# Altium PCB wather_project_PCB.PcbDoc
Units mm, origin at the board's own origin, x right, y up, seen from the top; angles counter-clockwise.
Board outline 30.48 x 40 mm, 4 copper layers (Top Layer, GND 1, GND 2, Bottom Layer), stack 1.569 mm thick; 28 components, 23 nets, 149 pads, 70 vias.
Unrouted connection lines stored in the file: 1.
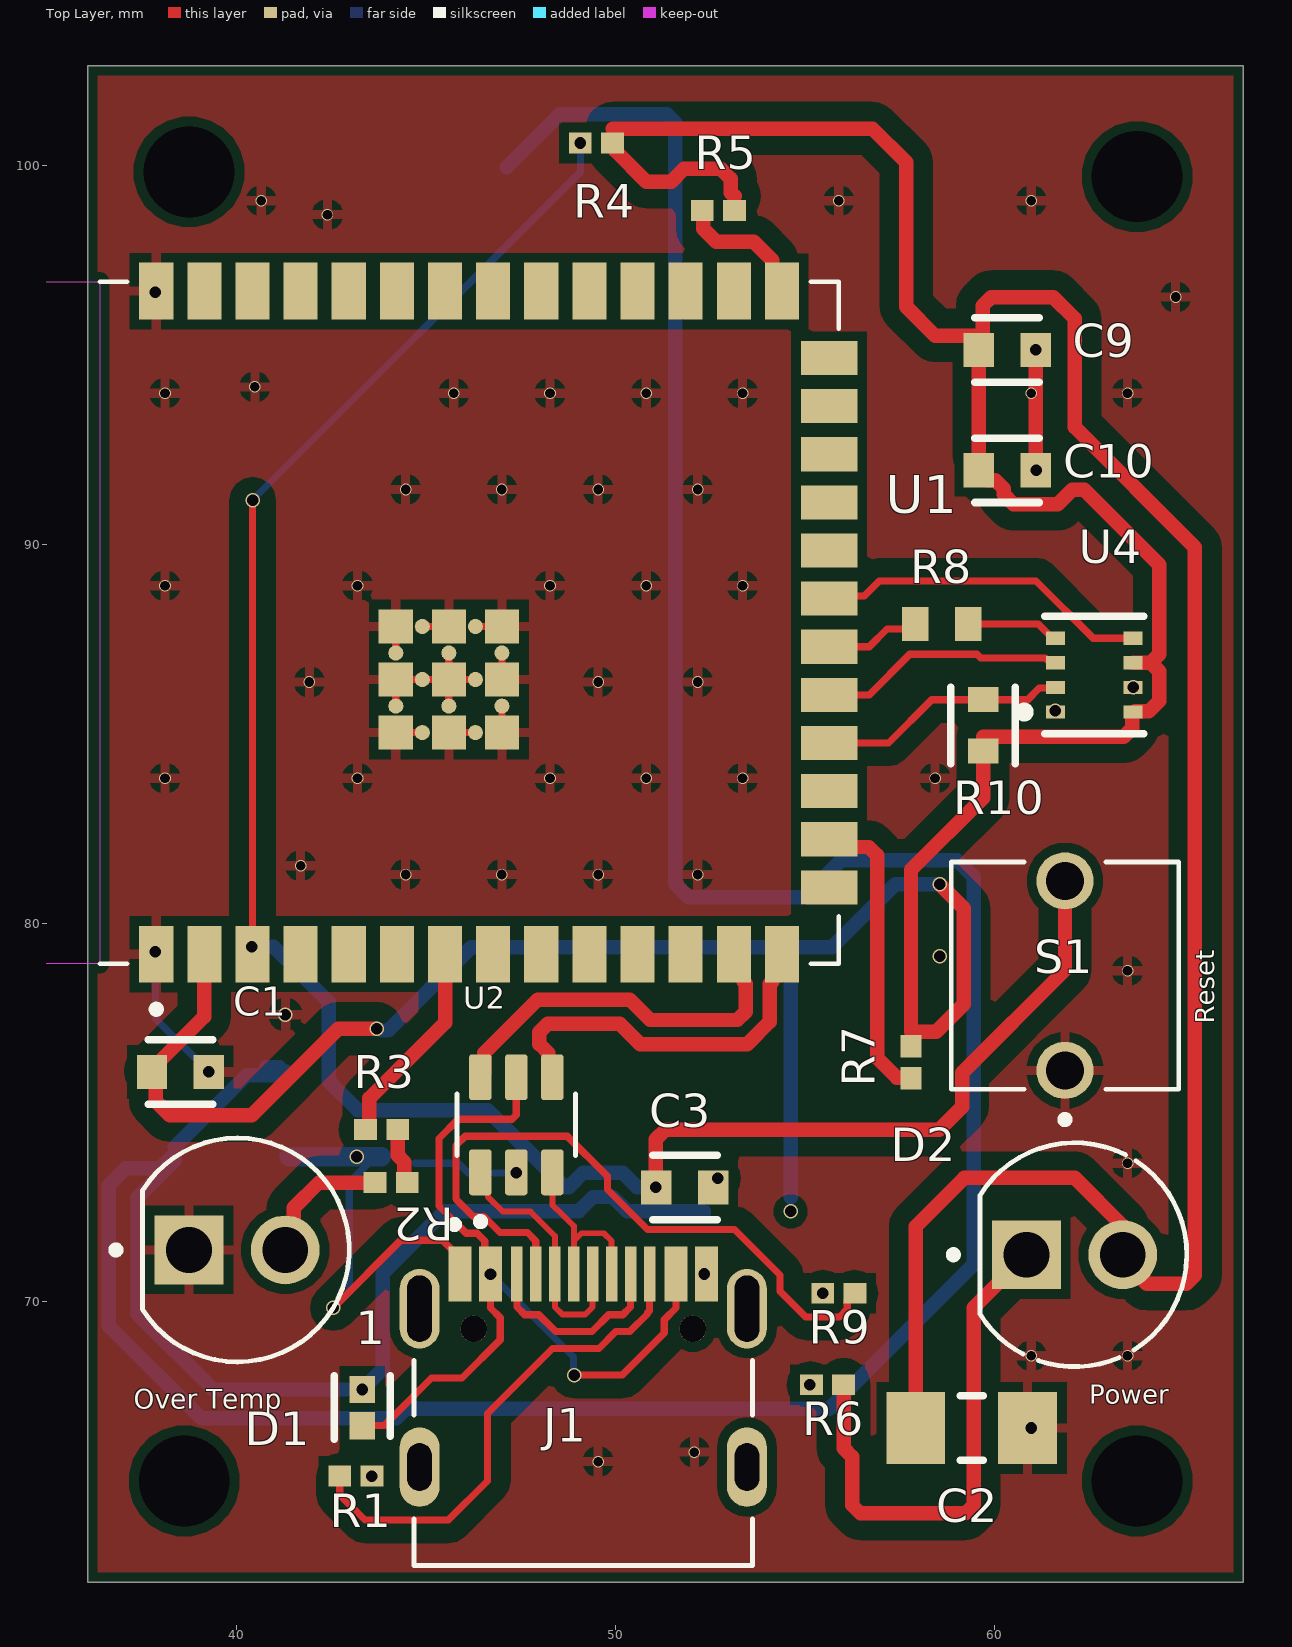
[diagram p0: Top Layer view]
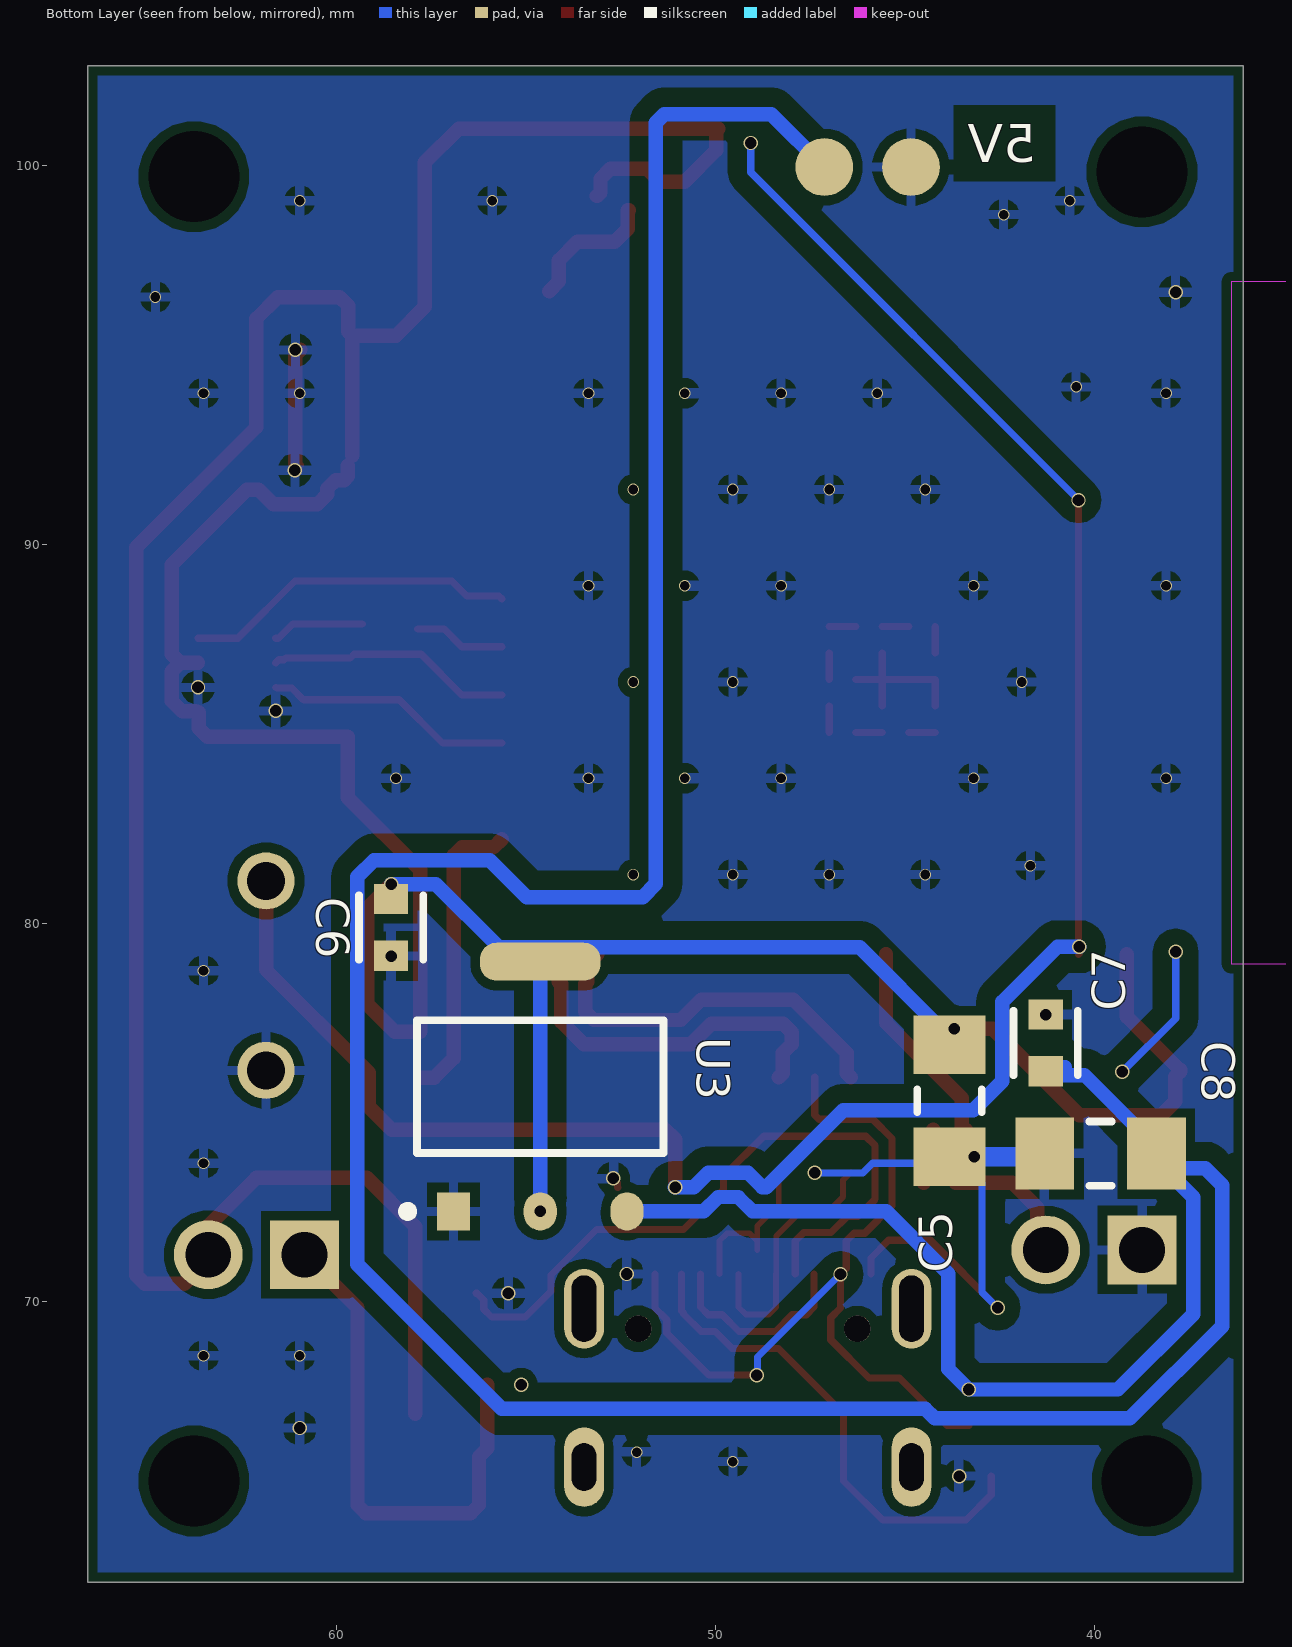
[diagram p1: Bottom Layer view, seen from below]
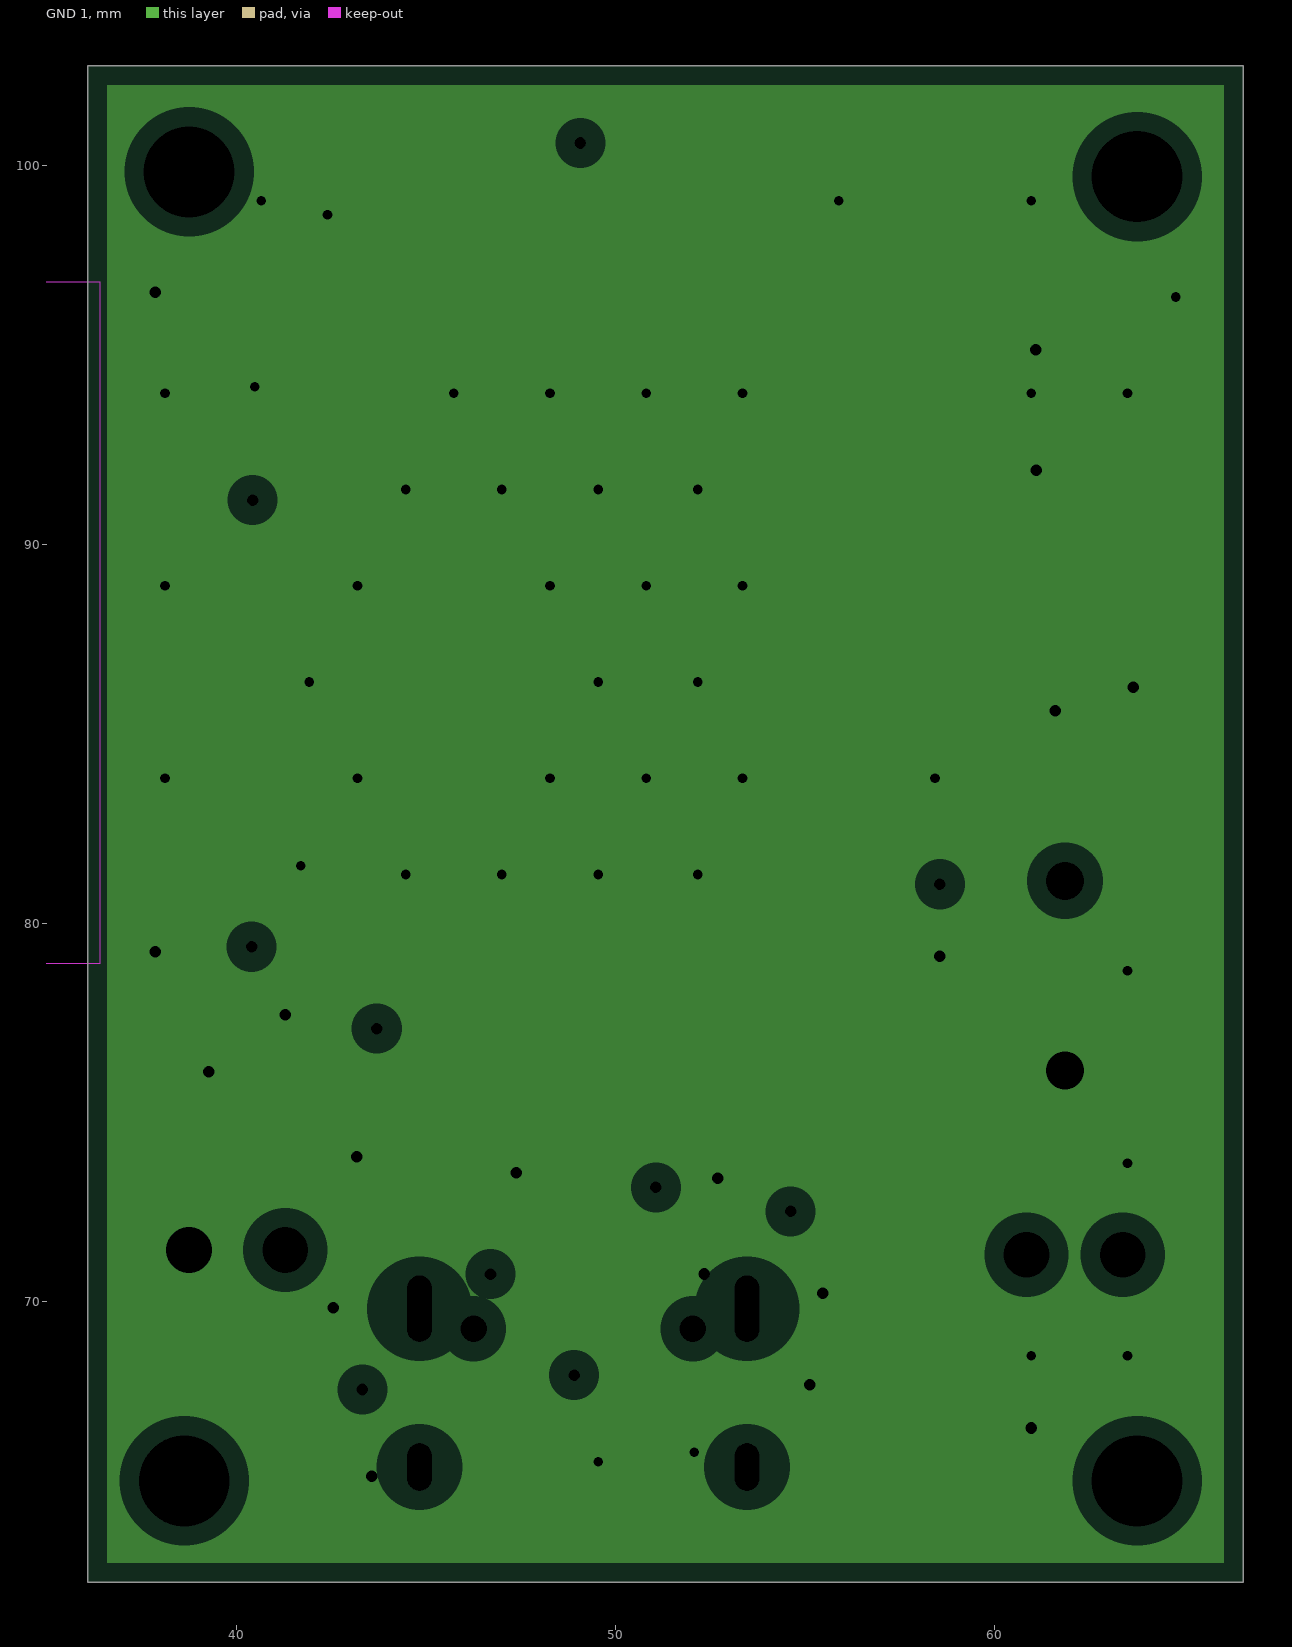
[diagram p2: GND 1, clearances drawn from the general rule]
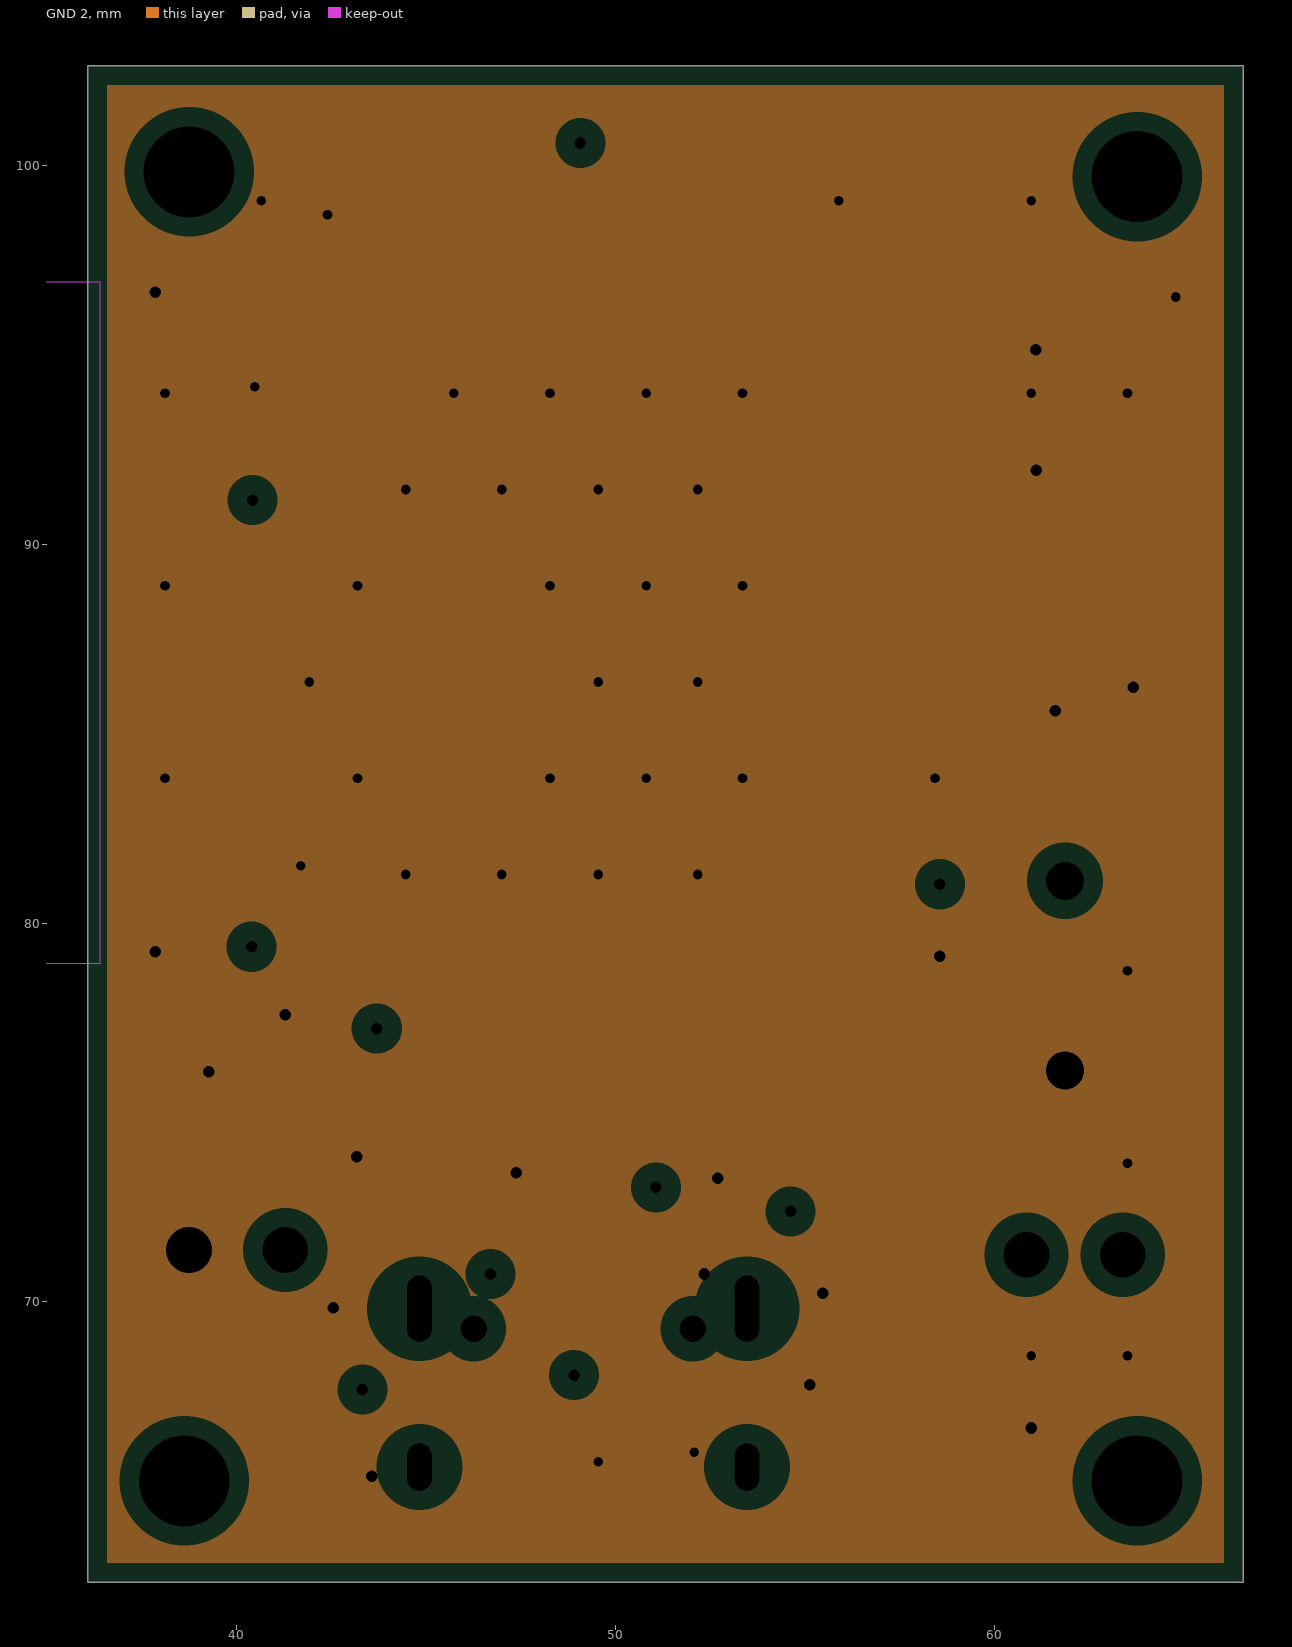
[diagram p3: GND 2, clearances drawn from the general rule]
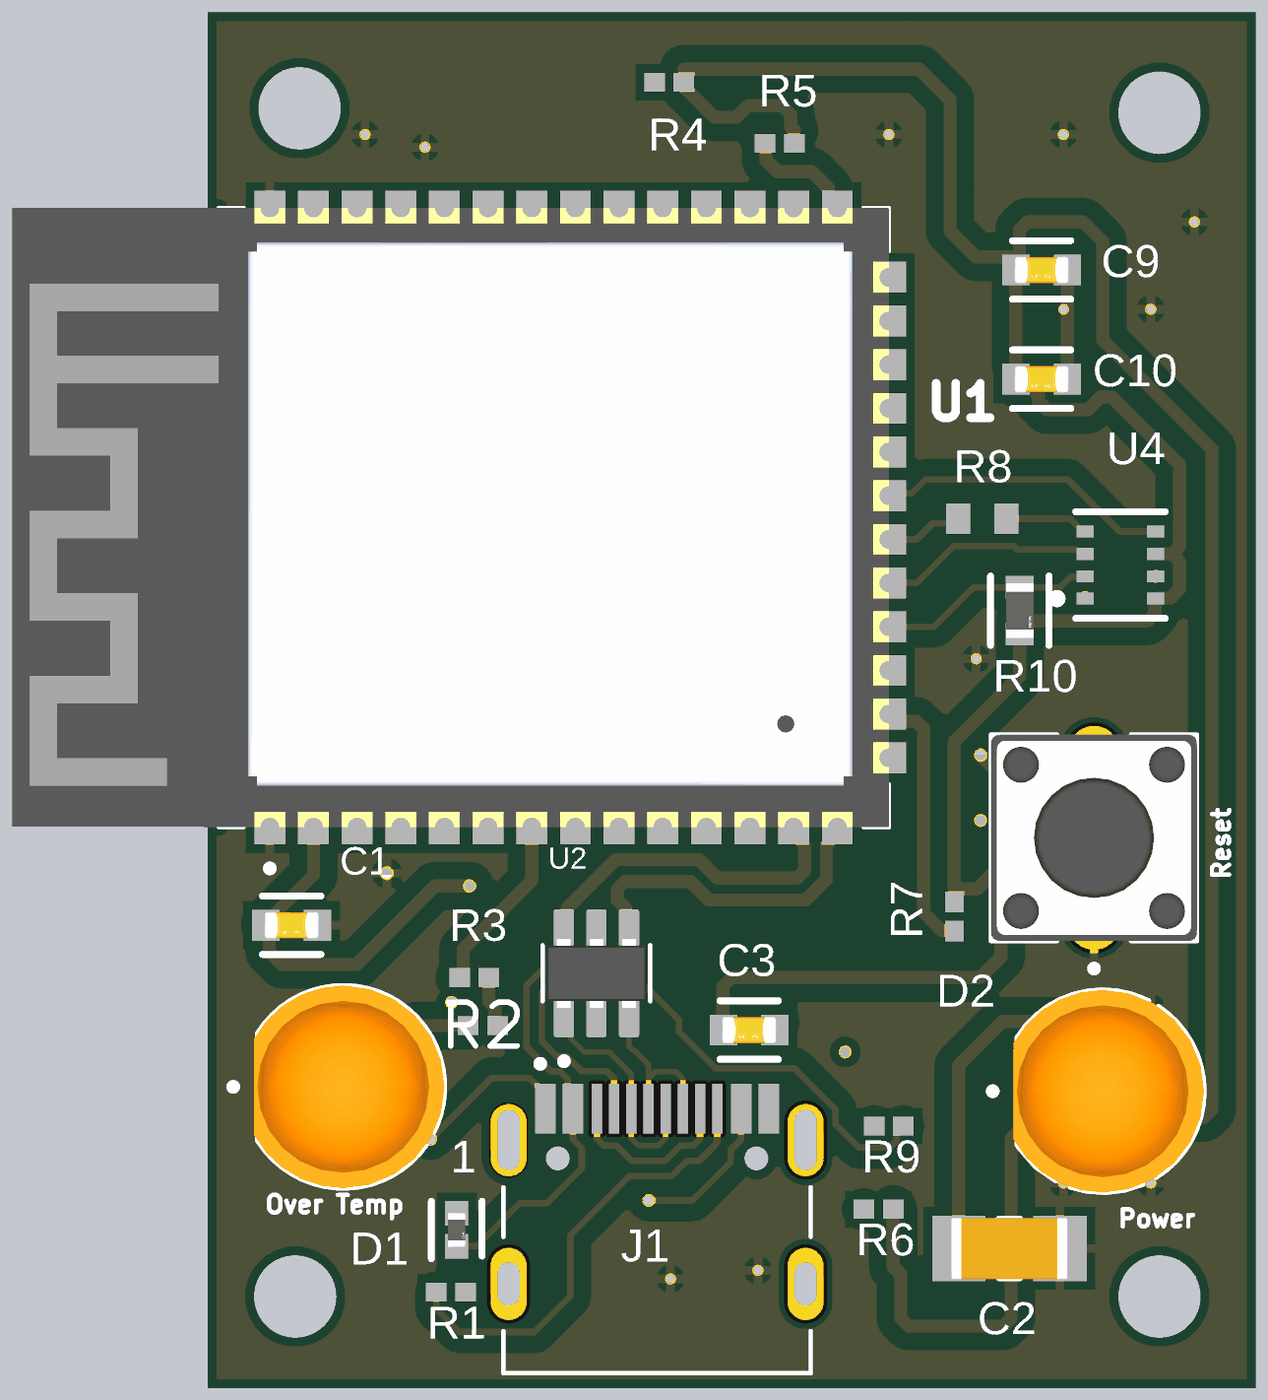
[diagram p4: 3D render of the assembled board from above, using the file's embedded part models]
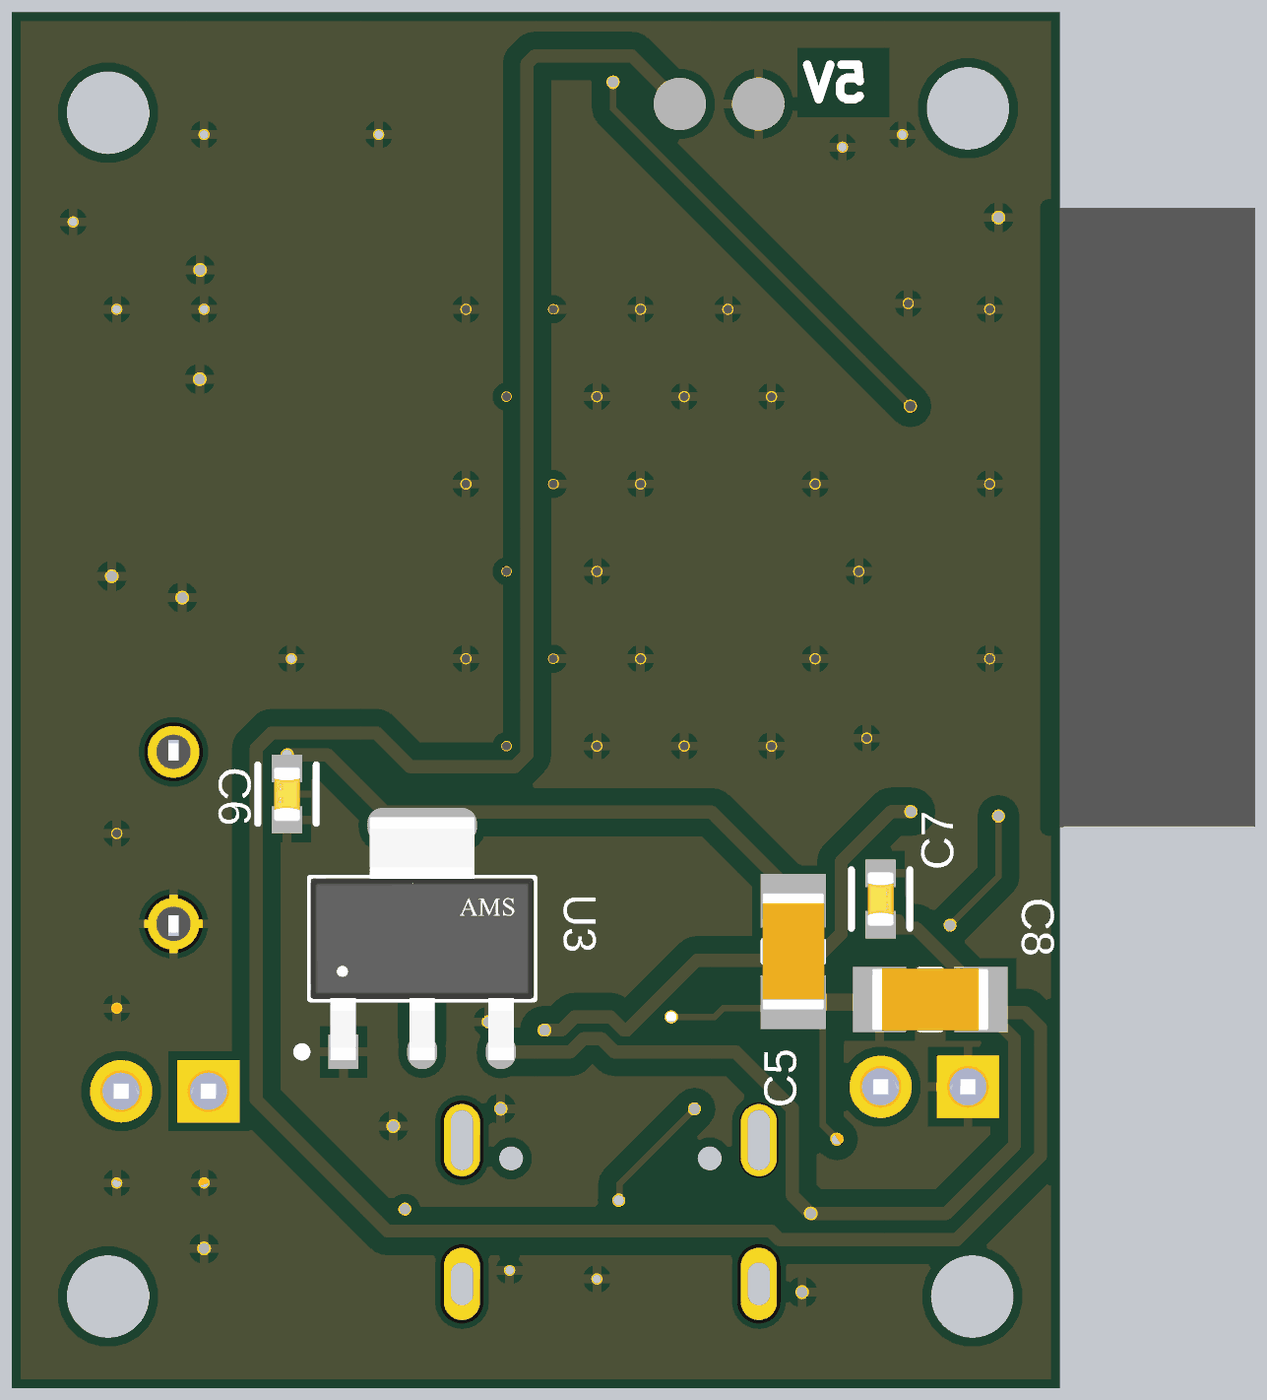
[diagram p5: 3D render of the assembled board from below, using the file's embedded part models]

## Layer stack, top to bottom
Top Solder: solder mask 0.0152, Solder Resist, Dk 3.8
Top Layer: signal copper 0.035
Dielectric 2: prepreg 0.0994, PP-015, Dk 4.1
GND 1: plane copper 0.0175, net GND
core: dielectric 1.265, FR-4, Dk 4.6
GND 2: plane copper 0.0175, net GND
Dielectric 3: prepreg 0.0994, PP-015, Dk 4.1
Bottom Layer: signal copper 0.035
Bottom Solder: solder mask 0.0152, Solder Resist, Dk 3.8

## Board outline
36.068,62.611 36.068,102.616 66.548,102.616 66.548,62.611

## Design rules (kind name [scope] priority, off if disabled: settings)
BoardOutlineClearance [All] p1: gap=0.254 ignorepadtopadclearanceinfootprint=FALSE except(0: Arc-SplitContinuation Track-SplitContinuation SMDPad-SplitContinuation THPad-SplitContinuation Via-SplitContinuation Fill-SplitContinuation Poly-SplitContinuation Region-SplitContinuation Text-SplitContinuation)
Clearance [All] p1: gap=0.254 ignorepadtopadclearanceinfootprint=TRUE except(0.508: Arc-Fill Arc-Poly Arc-Region Track-Fill Track-Poly Track-Region)
DiffPairsRouting [All] p1: maxlimit=0.254 minlimit=0.254 mostfreqgap=0.254 toplayer_minwidth=0.381 toplayer_maxwidth=0.381 toplayer_prefwidth=0.381 bottomlayer_minwidth=0.381 bottomlayer_maxwidth=0.381 bottomlayer_prefwidth=0.381 maxuncoupledlength=12.7
HoleSize [All] p1: absolutevalues=TRUE maxlimit=5.842 minlimit=0.1 maxpercent=80.000 minpercent=20.000
HoleToHoleClearance [All] p1: gap=0.5 allowstackedmicrovias=TRUE
MinimumSolderMaskSliver [All] p1: minsoldermaskwidth=0.1
PlaneClearance [All] p1: clearance=0.508
PlaneConnect [All] p1: planeconnectstyle=Relief reliefexpansion=0.508 reliefentries=4 reliefconductorwidth=0.254 reliefairgap=0.254
PolygonConnect [All] p1: connectstyle=Relief reliefconductorwidth=0.254 reliefentries=4 polygonreliefangle="90 Angle" airgapwidth=0.254
RoutingVias [All] p1: holewidth=0.305 width=0.381 viastyle="Through Hole" minholewidth=0.254 minwidth=0.305 maxholewidth=0.711 maxwidth=1.27
SilkToSolderMaskClearance [IsPad] p1: minsilkscreentomaskgap=0.1 clearancetoexposedcopper=TRUE
SolderMaskExpansion [All] p1: expansion=0.01 istentingtop=FALSE
SupplyNets "Schematic Supply Nets_2" [InNet('3.3V')] p1: voltage=0.000
SupplyNets "Schematic Supply Nets_1" [InNet('GND')] p2: voltage=0.000
SupplyNets "Schematic Supply Nets" [InNet('VCC')] p3: voltage=0.000
Width [All] p1: maxlimit=1.27 minlimit=0.127 preferedwidth=0.254 minimp=50.000000 maximp=50.000000 favimp=50.000000
23 further rules are at their usual default settings.

## Classes and differential pairs
component class "USE C": 1 C5 C6 C7 C8 J1 R1 R9 U2 U3
component class SENSOR: C9 C10 R10 U4
component class esp32: C1 C2 C3 D1 D2 R2 R3 R4 R5 R6 R7 R8 S1 U1
differential pair D: +D_P -D_N

## Components (designator, comment, footprint, x,y, rotation, side; value= is the part's Value field where it differs from the comment)
1 "0" FP-RC0402-0_4-IPC_A 43.307,67.212 r270 top
C1 "100nf" FP-CC0603-DA-MFG 38.505,76.073 r0 top value="100 nF"
C2 "22uF" CAPC3216X180X55ML20T25 59.387,66.675 r180 top
C3 "100nf" FP-CC0603-DA-MFG 51.816,73.025 r0 top value="100 nF"
C5 "22uF" CAPC3216X180X55ML20T25 43.815,75.311 r90 bottom
C6 "100nf" FP-CC0603-DA-MFG 58.547,79.883 r270 bottom value="100 nF"
C7 "100nf" FP-CC0603-DA-MFG 41.275,76.835 r90 bottom value="100 nF"
C8 "22uF" CAPC3216X180X55ML20T25 39.829,73.914 r180 bottom
C9 "100nf" FP-CC0603-DA-MFG 60.325,95.123 r0 top value="100 nF"
C10 "100nf" FP-CC0603-DA-MFG 60.325,91.948 r0 top value="100 nF"
D1 "led_s" LEDRD254W57D500H1070 40.005,71.374 r0 top
D2 "led_P" LEDRD254W57D500H1070 62.103,71.247 r0 top
J1 "USB-C" HRO_TYPE-C-31-M-12 49.137,65.644 r0 top
R1 "5.1k" RESC1005X40X25NL05T10 43.136,65.405 r0 top
R2 "100k" RESC1005X40X25NL05T10 44.069,73.152 r180 top
R3 "100k" RESC1005X40X25NL05T10 43.815,74.549 r0 top
R4 "100k" RESC1005X40X25NL05T10 49.486,100.584 r0 top
R5 "100k" RESC1005X40X25NL05T10 52.705,98.806 r0 top
R6 "100k" RESC1005X40X25NL05T10 55.582,67.818 r0 top
R7 "100k" RESC1005X40X25NL05T10 57.785,76.327 r90 top
R8 "22R" RESC1608X55X25NL10T15 58.601,87.891 r180 top
R9 "5.1k" RESC1005X40X25NL05T10 55.88,70.231 r180 top
R10 "10k" FP-RC0603-0_55-IPC_C 59.69,85.217 r270 top
S1 "BUTT-2" SW_BUTT-2 61.849,78.613 r90 top
U1 "ESP32-S3-WROOM-1-N8R8" XCVR_ESP32S3WROOM1N8R8 43.13,87.925 r90 top
U2 "USBLC6-2SC6" SOT95P280X145-6N 47.371,74.676 r90 top
U3 "AMS1117-3.3" FP-AMS1117-IPC_C 54.614,75.685 r90 bottom
U4 "BME280" FP-BME280-MFG 62.62,86.543 r180 top

## Footprints (in the part's own frame and the unit in brackets; to place one, negate y for a bottom-side part, rotate by r counter-clockwise, add the part's x,y. Pads: shape width x height; smd on the part's side, far side on the other; paste and mask are expansions set on the pad)
CAPC3216X180X55ML20T25 [mm] "Chip Capacitor, 2-Leads, Body 3.4x1.8mm, IPC Low Density"
  rect 1.55x1.9 smd: 1(-1.475,0) 2(1.475,0)
  silkscreen extent -0.3,-0.85 0.3,0.85, body extent -1.7,-0.9 1.7,0.9, height 1.8
FP-AMS1117-IPC_C [mm]
  rect 1.004x0.872 smd paste+0 mask+0: 1(-3.295,2.29)
  rrect100% 1.004x0.872 smd paste+0 mask+0: 2(-3.295,0) 3(-3.295,-2.29)
  rrect87% 1.004x3.182 smd paste+0 mask+0: 4(3.295,0)
  silkscreen extent -3.42,-3.25 1.75,3.63, body extent -3.53,-3.25 3.53,3.25, height 1.8
FP-BME280-MFG [mm]
  rect 0.5x0.35 smd paste+0 mask+0: 1(1.025,0.975) 2(1.025,0.325) 3(1.025,-0.325) 4(1.025,-0.975) 5(-1.025,-0.975) 6(-1.025,-0.325) 7(-1.025,0.325) 8(-1.025,0.975)
  silkscreen extent -1.3,-1.55 1.97,1.55
FP-CC0603-DA-MFG [mm]
  rect 0.8x0.9 smd paste+0 mask+0: 1(-0.75,0) 2(0.75,0)
  silkscreen extent -0.85,-0.85 0.85,0.85, body extent -1.35,-0.75 1.35,0.75, height 0.25
FP-RC0402-0_4-IPC_A [mm]
  rect 0.715x0.672 smd paste+0 mask+0: 1(-0.479,0) 2(0.479,0)
  silkscreen extent -0.84,-0.74 0.84,0.74, body extent -1.04,-0.54 1.04,0.54, height 0.25
FP-RC0603-0_55-IPC_C [mm]
  rect 0.659x0.812 smd paste+0 mask+0: 1(-0.677,0) 2(0.677,0)
  silkscreen extent -1.01,-0.85 1.01,0.85, body extent -1.11,-0.55 1.11,0.55, height 0.25
HRO_TYPE-C-31-M-12 [mm]
  rect 0.6x1.45 smd paste+0 mask+0.02: A1B12(-3.25,5.095) A4B9(-2.45,5.095) B1A12(3.25,5.095) B4A9(2.45,5.095)
  rect 0.3x1.45 smd paste+0 mask+0.102: A5(-1.25,5.095) A6(-0.25,5.095) A7(0.25,5.095) A8(1.25,5.095) B5(1.75,5.095) B6(0.75,5.095) B7(-0.75,5.095) B8(-1.75,5.095)
  oval 1.05x2.1 hole 0.65 slot 1.75 at 90 deg mask+0.05: S1(-4.32,4.18)
  oval 1.05x2.1 hole 0.65 slot 1.75 at 90 deg mask+0.102: S2(4.32,4.18)
  oval 1.05x2.1 hole 0.65 slot 1.25 at 90 deg mask+0.102: S3(-4.32,0) S4(4.32,0)
  round 0.7 hole 0.7 unplated mask+0: ""(-2.89,3.65) ""(2.89,3.65)
  silkscreen extent -4.47,-2.6 4.47,6.5
LEDRD254W57D500H1070 [mm]
  round 1.815 hole 1.21: A(1.27,0)
  rect 1.815x1.815 / inner round 1.815 / far side rect 1.815x1.815 hole 1.21: C(-1.27,0)
  silkscreen extent -3.3,-2.96 2.96,2.96, body extent -2.6,-2.95 2.95,2.95, height 9.1
RESC1005X40X25NL05T10 [mm] "Chip Resistor, 2-Leads, Body 1.00x0.50mm, IPC Medium Density"
  rect 0.6x0.55 smd: 1(-0.425,0) 2(0.425,0)
  body extent -0.53,-0.27 0.53,0.28, height 0.4
RESC1608X55X25NL10T15 [mm] "Chip Resistor, 2-Leads, Body 1.70x0.90mm, IPC Medium Density"
  rect 0.7x0.9 smd: 1(-0.7,0) 2(0.7,0)
  body extent -0.85,-0.45 0.85,0.45, height 0.55
SOT95P280X145-6N [mm]
  rrect25% 1.21x0.59 smd: 1(-1.255,0.95) 2(-1.255,0) 3(-1.255,-0.95) 4(1.255,-0.95) 5(1.255,0) 6(1.255,0.95)
  silkscreen extent -2.65,-1.57 0.81,1.56, body extent -1.4,-1.46 1.4,1.46, height 0.4
SW_BUTT-2 [mm]
  round 1.508 hole 1 mask+0.102: 1(-2.5,0) 2(2.5,0)
  silkscreen extent -3.9,-3 3,3, body extent -3,-3 3,3, height 5.1
XCVR_ESP32S3WROOM1N8R8 [mm]
  rect 1.5x0.9 smd: 1(-8.75,5.26) 2(-8.75,3.99) 3(-8.75,2.72) 4(-8.75,1.45) 5(-8.75,0.18) 6(-8.75,-1.09) 7(-8.75,-2.36) 8(-8.75,-3.63) 9(-8.75,-4.9) 10(-8.75,-6.17) 11(-8.75,-7.44) 12(-8.75,-8.71) 13(-8.75,-9.98) 14(-8.75,-11.25) 27(8.75,-11.25) 28(8.75,-9.98) 29(8.75,-8.71) 30(8.75,-7.44) 31(8.75,-6.17) 32(8.75,-4.9) 33(8.75,-3.63) 34(8.75,-2.36) 35(8.75,-1.09) 36(8.75,0.18) 37(8.75,1.45) 38(8.75,2.72) 39(8.75,3.99) 40(8.75,5.26)
  rect 0.9x1.5 smd: 15(-6.985,-12.5) 16(-5.715,-12.5) 17(-4.445,-12.5) 18(-3.175,-12.5) 19(-1.905,-12.5) 20(-0.635,-12.5) 21(0.635,-12.5) 22(1.905,-12.5) 23(3.175,-12.5) 24(4.445,-12.5) 25(5.715,-12.5) 26(6.985,-12.5)
  rect 0.9x0.9 smd: 41_1(-1.5,-2.46) 41_2(-2.9,-2.46) 41_3(-0.1,-2.46) 41_4(-2.9,-3.86) 41_5(-1.5,-3.86) 41_6(-0.1,-3.86) 41_7(-2.9,-1.06) 41_8(-1.5,-1.06) 41_9(-0.1,-1.06)
  round 0.4 smd mask+0: 41_10(-1.5,-1.76) 41_11(-2.9,-1.76) 41_12(-0.1,-1.76) 41_13(-2.9,-3.16) 41_14(-1.5,-3.16) 41_15(-0.1,-3.16) 41_16(-2.2,-1.06) 41_17(-0.8,-1.06) 41_18(-2.2,-2.46) 41_19(-0.8,-2.46) 41_20(-2.2,-3.86) 41_21(-0.8,-3.86)
  Keep-Out Layer region: 9,6.75 -9,6.75 -9,12.75 9,12.75
  Keep-Out Layer region: 9,6.75 -9,6.75 -9,12.75 9,12.75
  silkscreen extent -10.3,-12.75 9,6.74, body extent -9,-12.75 9,12.75, height 3.25

## Part data
1: library part CMP-2002-07342-2, "RES SMD 0 OHM JUMPER 1/16W 0402", Case Code (Imperial)=0402, Case Code (Metric)=1005, Max Operating Temperature=155°C, Max Power Dissipation=63mW, Min Operating Temperature=-55°C, Power Rating=62.5mW, Resistance=0R, Resistor Type="Thick Film", Temperature Coefficient=200ppm/°C, Tolerance=1%, Voltage Rating=50V, Case/Package=0402, Contact Plating=Tin, Features="Moisture Resistant", Height=0.35mm, Lead Free="Lead Free", Length=1mm, Mount="Surface Mount", Number of Terminations=2, Packaging="Tape and Reel", Radiation Hardening=No, RoHS Compliant=Yes, Series=RC, Size Code=0402, Termination=SMD/SMT, Width=0.5mm
C1 C3 C6 C7 C9 C10: library part CMP-2100-03601-2, "CAP CER 0.1UF 50V X7R 0603", Capacitance="100 nF", Manufacturer=YAGEO, Manufacturer Part Number=CC0603KRX7R9BB104, Package=CC0603-DA, Temperature="-55°C to +125°C", Temperature Characteristic=X7R, Temperature Coefficient=15%, Temperature Range High=+125°C, Temperature Range Low=-55°C, Tolerance=0.1, Voltage="50 V", Automotive=No, Category=Cap, ComponentLink2Description=Datasheet, ComponentLink2URL=http://www.yageo.com/documents/recent/UPY-GPHC_X7R_6.3V-to-50V_18.pdf, Device Class L1="Passive Components", Device Class L2=Capacitors, Device Class L3="Ceramic Capacitors", Digikey Description="CAP CER 0.1UF 50V X7R 0603", Footprint Url=http://www.yageo.com/exep/pages/download/literatures/UPY-C_GEN_24.pdf, Height=0.9mm, Lead Free=Yes, Material=Ceramic, Mouser Description="Multilayer Ceramic Capacitor, CC Series, 0.1 - F, - 10%, X7R, 50 V, 0603 [1608 Metric]", Octopart=https://octopart.com/cc0603krx7r9bb104-yageo-42244635, RoHS=TRUE, Voltage Rating="50 V"
C2 C5 C8: library part CMP-1662-00010-2, "Chip Capacitor, 22 uF, +/- 10%, 25 V, -55 to 85 degC, 1206 (3216 Metric), RoHS, Tape and Reel", Capacitance="22 uF", Case Code (Imperial)=1206, Case Code (Metric)=3216, Max Operating Temperature="85 degC", Min Operating Temperature="-55 degC", Package Quantity=2000, PartNumber=GRM31CR61E226KE15L, Tolerance=10%, Type (Capacitors)=X5R, Voltage Rating="25 V", Case\/Package=1206, ComponentLink1Description="Manufacturer URL", ComponentLink1URL=http://www.murata.com/, ComponentLink2Description=Datasheet, ComponentLink2URL=http://search.murata.co.jp/Ceramy/image/img/A01X/G101/ENG/GRM31CR61E226KE15-01.pdf, DatasheetVersion=03/2016, Height="1.6 mm", Length="3.2 mm", Mount="Surface Mount", Mounting Technology="Surface Mount", PackageDescription="2-Pin Surface Mount Device, Body 3.2 x 1.6 mm", PackageReference=1206, Packaging="Tape and Reel", Pins=2, Radiation Hardening=No, REACH SVHC="No SVHC", RoHSCompliant=true, Voltage Rating (DC)="25 V", Width="1.6 mm"
D1 D2: library part L08R5000Q1, "LED, 5MM, ORANGE; LED / Lamp Size: 5mm / T-1 3/4; LED Colour: Orange; Typ Luminous Intensity: 4.3mcd; Viewing Angle: ...", Package=None, Availability="In Stock", Check_prices=https://www.snapeda.com/parts/L08R5000Q1/LED+Technology/view-part/?ref=eda, MF="LED Technology", MP=L08R5000Q1, Price=None, SnapEDA_Link=https://www.snapeda.com/parts/L08R5000Q1/LED+Technology/view-part/?ref=snap
J1: "USB-C (USB TYPE-C) USB 3.2 Gen 2 (USB 3.1 Gen 2, Superspeed + (USB 3.1)) Receptacle Connector 24 Position Surface Mount, Through Hole", Package=None, Check_prices=https://www.snapeda.com/parts/USB-C/Adam+Tech/view-part/?ref=eda, MF="Adam Technologies", MP=USB-C, SnapEDA_Link=https://www.snapeda.com/parts/USB-C/Adam+Tech/view-part/?ref=snap
R1 R9: library part CMP-2002-07753-1, Manufacturer="Yageo / Phycomp", Part Number=RC0402FR-075K1L
R2 R3 R4 R5 R6 R7: library part CMP-2002-07343-1, Manufacturer="Yageo / Phycomp", Part Number=RC0402FR-07100KL
R8: library part CMP-1659-00033-1, "Chip Resistor, 22 Ohm, +/- 1%, 0.1 W, -55 to 155 degC, 0603 (1608 Metric), RoHS, Tape and Reel", Case\Package=SIP, Max Input Voltage="1.4 V", Max Operating Temperature="100 degC", Max Ouput Current="8 A", Min Operating Temperature="-25 degC", Package Quantity=200, ComponentLink1Description="Manufacturer URL", ComponentLink1URL=http://www.yageo.com/, ComponentLink2Description=Datasheet, ComponentLink2URL=http://www.yageo.com/documents/recent/PYu-RC_Group_51_RoHS_L_04.pdf, DatasheetVersion="Rev. 4, 02/2016", Height="19.6 mm", Length="18.5 mm", Mount="Through Hole", Output Current="8 A", PackageDescription="2-Pin Surface Mount Device, Body 1.6 x 0.8 mm", PackageReference=0603, Packaging=Rail/Tube, Pins=4, Radiation Hardening=No, REACH SVHC=Unknown, RoHSCompliant=true
R10: library part CMP-2100-03664-2, "RES 10K OHM 1% 1/10W 0603", Case Code (Imperial)=0603, Case Code (Metric)=1608, Max Operating Temperature=155°C, Max Power Dissipation=100mW, Min Operating Temperature=-55°C, Resistance=10kR, Resistance Tolerance=1%, Resistor Type="Thick Film", Temperature Coefficient=100ppm/°C, Voltage Rating=75V, Voltage Rating (DC)=50V, Case/Package=0603, Construction=Rectangular, Depth=0.8mm, Features="Moisture Resistant", Height=0.45mm, Lead Free="Lead Free", Lead Pitch=0.3mm, Length=1.6mm, Military Standard=Not, Number of Pins=2, Number of Terminations=2, Packaging="Tape and Reel", Power Rating=100mW, RoHS Compliant=Yes, Series=RC, Size Code=0603, Termination=SMD/SMT, Tolerance=1%, Weight=7.1E-05oz, Width=0.8mm
S1: "Tactile Switches MINI PUSH BUTTON SWITCH 2-PIN QTY. 4", Package=None, Check_prices=https://www.snapeda.com/parts/BUTT-2/Gravitech/view-part/?ref=eda, MF=Gravitech, MP=BUTT-2, SnapEDA_Link=https://www.snapeda.com/parts/BUTT-2/Gravitech/view-part/?ref=snap
U1: "Bluetooth, WiFi 802.11b/g/n, Bluetooth v5.0 Transceiver Module 2.4GHz PCB Trace Surface Mount", Package=None, Availability="In Stock", Check_prices=https://www.snapeda.com/parts/ESP32-S3-WROOM-1-N8R8/Espressif+Systems/view-part/?ref=eda, MF="Espressif Systems", MP=ESP32-S3-WROOM-1-N8R8, Price=None, Purchase-URL=https://pricing.snapeda.com/search?q=ESP32-S3-WROOM-1-N8R8&ref=eda, SnapEDA_Link=https://www.snapeda.com/parts/ESP32-S3-WROOM-1-N8R8/Espressif+Systems/view-part/?ref=snap
U2: "17V Clamp 5A (8/20Âµs) Ipp Tvs Diode Surface Mount SOT-23-6", Package="SOT-23-6 STMicroelectronics", Availability="In Stock", Check_prices=https://www.snapeda.com/parts/USBLC6-2SC6/STMicroelectronics/view-part/?ref=eda, MF=STMicroelectronics, MP=USBLC6-2SC6, Price=None, Purchase-URL=https://pricing.snapeda.com/search/part/USBLC6-2SC6/?ref=eda, SnapEDA_Link=https://www.snapeda.com/parts/USBLC6-2SC6/STMicroelectronics/view-part/?ref=snap
U3: library part CMP-209535-000001-1, "LDO Voltage Regulators 1A, 3.3V", Dropout Voltage=1.1V, Manufacturer="Advanced Monolithic Systems", Max Junction Temp=+125°C, Max Power Dissipation=1.2W, Max Supply Voltage=15V, Nominal Supply Current=5mA, Output Current=1A, Output Voltage=3.3V, Package=AMS1117, Temperature="-40°C to +125°C", Temperature Range Low=-40°C, Automotive=No, Category=IC, ComponentLink2Description=Datasheet, ComponentLink2URL=http://www.advanced-monolithic.com/pdf/ds1117.pdf, Device Class L1="Integrated Circuits (ICs)", Device Class L2="Power Management ICs", Device Class L3="Voltage Regulators - Linear", Height=1.8mm, Ipc Land Pattern Name=SOT229P700X180-4, Lead Free=Yes, Manufacturer Part Number=AMS1117-3.3, Number Of Outputs=1, Octopart=https://octopart.com/ams1117-3.3-advanced+monolithic+systems-25899300, Output Type=Fixed, RoHS=TRUE, Standoff Height=0.64mm, Temperature Range High=+125°C
U4: library part CMP-2000-05073-3, "SENSOR PRESSURE HUMIDITY TEMP", Case/Package=LGA, Max Operating Temperature=85°C, Min Operating Temperature=-40°C, Accuracy=3%, Lead Free="Lead Free", Mount="Surface Mount", Number of Pins=8, Output Type=SPI, Packaging="Cut Tape", Response Time=1s, Sensor Type=Temperature

## Free pads (board coordinates)
  round 1.524 hole 2.4 unplated: 1(63.754,99.695) 2(38.735,99.822) 3(38.608,65.278) 4(63.754,65.278)
  round 1.524 smd far side: 9(44.831,99.949) 12(47.117,99.949)

## Via types
v1: diameter 0.305, hole 0.254, Top Layer to Bottom Layer, 42 vias
v2: diameter 0.381, hole 0.305, Top Layer to Bottom Layer, 28 vias

## Nets (pads, with @x,y where several pads share a name; then routed paths per layer and width w, separated by ;. In a path a pad name is that pad's centre, name@x,y a point inside that pad or via, vN(x,y) a via of type N, cw(c..) or ccw(c..) an arc to the next point about the centre after c; other vN are vias at no path point)
3.3V: C1.1 C2.2 C5.2 C6.1 C9.1 C10.1 D2.A R4.2 R5.2 R7.2 R10.2 U1.2 U3.2 U3.4 U4.6 U4.8 | length 130.7
  Top Layer w0.381: C1.1@37.731,76.073 37.856,75.948 37.856,75.301 38.227,74.93 40.386,74.93 42.67,77.214 v2(43.688,77.214) ; C1.1@37.731,76.123 39.14,77.532 U1.2 ; 53.13,99.185 53.109,99.185 53.024,99.269 53.024,99.644 52.764,99.904 51.796,99.904 51.457,99.566 50.8,99.566 49.968,100.398 49.968,100.906 49.911,100.963 56.769,100.963 57.658,100.074 57.658,96.264 58.42,95.502 C9.1@59.575,95.502 ; C2.2@57.912,67.054 57.912,71.993 59.196,73.277 62.103,73.277 63.373,72.007 D2.A 63.373,71.237 63.783,70.828 63.783,70.706 64.006,70.483 65.055,70.483 65.278,70.706 65.278,89.914 62.103,93.089 62.103,95.952 61.538,96.518 59.902,96.518 59.678,96.294 59.678,95.605 C9.1@59.575,95.502 ; v2(58.547,81.024) 59.182,80.389 59.182,77.862 58.451,77.13 57.785,77.13 57.785,81.405 59.69,83.31 R10.2 59.69,84.919 63.404,84.919 63.627,85.142 63.627,85.568 U4.8 63.689,85.568 63.704,85.583 64.064,85.583 64.339,85.859 64.339,86.645 64.116,86.868 ; C10.1@59.575,92.327 C9.1@59.575,95.501 ; C10.1@59.69,92.073 59.69,91.783 59.784,91.688 60.007,91.688 60.23,91.465 60.23,91.314 60.491,91.053 61.659,91.053 62.042,91.437 62.358,91.437 64.339,89.455 64.339,87.091 64.116,86.868 ; U4.6 64.116,86.868
  Bottom Layer w0.381: C5.2@43.815,77.164 43.99,77.164 46.184,79.358 U3.4@54.614,79.358 ; U3.2@54.614,72.769 54.61,72.769 54.614,72.773 U3.4 U3.4@54.614,79.358 ; v2(58.547,81.024) 57.368,81.024 55.703,79.358 U3.4@54.614,79.358
  other v2: 54.61,72.39
CS: R10.1 U1.18 U4.2 | length 6.6
  Top Layer w0.191: U1.18 57.191,84.75 58.335,85.894 R10.1 60.865,85.894 61.171,86.2 61.577,86.2 U4.2
D_N: U1.13 U2.6 | length 10.1
  Top Layer w0.381: U2.6 46.526,76.035 46.526,76.571 47.935,77.98 47.993,77.98 50.365,77.98 50.905,77.441 53.204,77.441 53.412,77.648 53.428,77.664 53.428,78.392 53.37,78.45 53.37,78.915 U1.13
D_P: U1.14 U2.4 | length 9.9
  Top Layer w0.381: U2.4 48.217,76.035 48.217,76.571 47.981,76.807 47.981,77.122 47.993,77.135 48.204,77.345 50.102,77.345 50.642,76.806 53.412,76.806 53.467,76.806 54.063,77.401 54.063,78.392 54.121,78.45 54.121,78.915 U1.14
ESP_LED: R3.1 U1.7 | length 5.5
  Top Layer w0.381: R3.1 43.411,74.549 43.495,74.634 43.495,75.372 45.49,77.367 U1.7
GND: C1.2 C2.1 C3.2 C5.1 C6.2 C7.2 C8.1 C9.2 C10.2 D1.C J1.A1B12 J1.B1A12 pad.9 R1.2 R6.1 R9.2 S1.1 U1.1 U1.40 U1.41_1 U1.41_2 U1.41_3 U1.41_4 U1.41_5 U1.41_6 U1.41_7 U1.41_8 U1.41_9 U1.41_10 U1.41_11 U1.41_12 U1.41_13 U1.41_14 U1.41_15 U1.41_16 U1.41_17 U1.41_18 U1.41_19 U1.41_20 U1.41_21 U2.2 U3.1 U4.1 U4.7 | length 31.8
  Top Layer w0.191: v2(37.846,96.647) 37.846,96.651 U1.40 ; v2(42.545,69.85) 44.323,71.628 45.423,71.628 45.887,71.164 J1.A1B12 ; U1.41_7 U1.41_11 ; U1.41_16 U1.41_8 U1.41_10 U1.41_1 ; U1.41_17 U1.41_9 ; U1.41_12 U1.41_3 ; U1.41_2 U1.41_13 ; U1.41_18 U1.41_1 ; U1.41_19 U1.41_1 ; U1.41_14 U1.41_1 ; U1.41_15 U1.41_6 ; U1.41_4 U1.41_20 ; U1.41_5 U1.41_21 ; v2(52.331,70.739) J1.B1A12 ; C3.2 52.578,73.037 52.578,73.155 v2(52.683,73.26) ; v2(55.118,67.818) R6.1 ; v2(55.455,70.231) R9.2@55.476,70.231 ; C2.1 v2(60.96,66.675) ; C10.2@60.948,92.087 61.075,91.96 v2(61.087,91.948) ; U4.1 v2(61.595,85.598) ; S1.1@61.849,76.073 S1.1
  Top Layer w0.381: C9.2@60.948,95.123 61.075,94.996 61.075,91.96 C10.2
  Bottom Layer w0.191: v2(37.846,79.248) 37.846,77.482 v2(39.255,76.073) ; C8.1 C8.1@41.382,73.836 ; v2(42.545,69.85) 42.96,70.265 42.96,73.156 C5.1@43.64,73.836 ; C5.1@44.704,73.66 45.847,73.66 46.101,73.406 v2(47.371,73.406) ; v2(58.547,79.121) C6.2
  Bottom Layer w0.508: C8.1@41.382,73.836 C5.1@43.64,73.836 ; v2(43.155,73.829) 43.634,73.829 C5.1@43.64,73.836 ; C5.1 C5.1@43.64,73.836
  other v1: 49.53,65.788 52.07,66.04 60.96,68.58 63.5,68.58 63.5,73.66 63.5,78.74 44.45,81.28 46.99,81.28 49.53,81.28 52.159,81.28 41.678,81.512 38.1,83.82 43.18,83.82 48.26,83.82 50.8,83.82 53.34,83.82 58.42,83.82 41.91,86.36 49.53,86.36 52.159,86.36 38.1,88.9 43.18,88.9 48.26,88.9 50.8,88.9 53.34,88.9 44.45,91.44 46.99,91.44 49.53,91.44 52.159,91.44 38.1,93.98 45.72,93.98 48.26,93.98 50.8,93.98 53.34,93.98 60.96,93.98 63.5,93.98 40.472,94.148 64.77,96.52 42.387,98.693 40.64,99.06 55.88,99.06 60.96,99.06
  other v2: 43.561,65.405 41.275,77.585 63.645,86.218 61.075,95.123
MISO: U1.21 U4.5 | length 8.8
  Top Layer w0.191: U1.21 55.701,88.631 56.554,88.631 56.951,89.027 61.087,89.027 62.596,87.518 U4.5
MOSI: U1.19 U4.3 | length 6.5
  Top Layer w0.191: U1.19 56.683,86.02 57.755,87.092 59.525,87.092 59.624,86.994 61.329,86.994 61.375,86.948 61.515,86.948 U4.3
Net1_2: 1.2 J1.A4B9 J1.B4A9 U2.5 | length 22.1
  Top Layer w0.191: 1.2@43.307,66.743 43.883,66.743 45.134,67.994 45.936,67.994 46.946,69.004 46.946,69.584 46.69,69.84 v2(46.69,70.736) 46.536,70.89 46.536,71.609 46.332,71.813 46.049,71.813 45.332,72.53 45.332,74.312 45.84,74.82 47.259,74.82 47.371,74.931 U2.5 ; v2(48.895,68.072) 50.165,68.072 51.275,69.182 51.275,69.531 51.584,69.84 51.584,70.736 J1.B4A9
  Bottom Layer w0.191: v2(46.69,70.736) 48.878,68.548 48.878,68.089 v2(48.895,68.072)
NetC3_1: C3.1 R4.1 S1.2 U1.3 | length 56.6
  Top Layer w0.191: v2(40.386,79.375) 40.386,79.199 U1.3 ; U1.3@40.41,79.375 v2(40.41,91.162)
  Top Layer w0.381: v2(51.054,73.025) 51.054,74.295 51.308,74.549 58.534,74.549 59.14,75.155 59.14,76.053 61.849,78.762 S1.2
  Bottom Layer w0.191: v2(40.41,91.162) 49.061,99.813 v2(49.061,100.584)
  Bottom Layer w0.381: v2(40.386,79.375) 40.964,79.375 42.42,77.918 42.42,75.827 43.192,75.055 46.62,75.055 48.65,73.025 48.75,73.025 49.131,73.406 50.183,73.406 50.564,73.025 v2(51.054,73.025) v2@51.066,73.025
NetD1_A: D1.A R2.2 | length 3.6
  Top Layer w0.381: D1.A 41.495,71.594 41.495,72.483 42.164,73.152 R2.2
NetD2_C: D2.C R6.2 | length 13.8
  Top Layer w0.381: R6.2 56.007,66.136 56.23,65.913 56.23,64.643 56.453,64.42 59.213,64.42 59.436,64.643 59.436,69.85 D2.C
NetJ1_A5: J1.A5 R9.1 | length 18.3
  Top Layer w0.191: J1.A5 47.886,71.609 47.663,71.832 46.942,71.832 46.516,72.258 46.234,72.258 45.777,72.715 45.777,74.127 46.025,74.375 46.845,74.375 48.717,74.375 49.775,73.318 49.775,72.972 50.833,71.914 53.128,71.914 54.331,70.711 54.331,70.286 55.01,69.607 55.9,69.607 56.104,69.811 56.104,70.051 56.284,70.231 R9.1
NetJ1_A6: J1.A6 J1.B6 U2.3 | length 4.3
  Top Layer w0.156: U2.3 48.321,72.56 48.433,72.448 48.445,72.448 48.888,72.005 48.888,71.609 ; J1.A6@48.888,71.372 48.888,71.609 ; J1.B6@49.886,70.74 49.886,71.609 49.682,71.813 49.092,71.813 48.888,71.609
NetJ1_A7: J1.A7 J1.B7 U2.1 | length 6.8
  Top Layer w0.156: U2.1 46.621,73.221 46.621,72.781 47.012,72.39 47.74,72.39 48.387,71.743 J1.B7 ; J1.B7 48.388,69.869 48.592,69.665 49.182,69.665 49.386,69.869 J1.A7@49.386,70.738
NetJ1_A8: J1.A8 J1.B8 | length 5.3
  Top Layer w0.191: J1.B8@47.388,70.738 47.388,69.869 47.592,69.665 47.964,69.665 48.408,69.22 49.366,69.22 49.81,69.665 50.182,69.665 50.386,69.869 J1.A8
NetJ1_B5: J1.B5 R1.1 | length 13.3
  Top Layer w0.191: R1.1 42.711,64.911 43.378,64.245 45.576,64.245 46.609,65.278 46.609,67.057 48.327,68.776 49.55,68.776 49.994,69.22 50.366,69.22 50.831,69.685 50.831,69.715 50.886,69.771 J1.B5
NetR2_1: R2.1 R3.2 | length 1.5
  Top Layer w0.381: R3.2 44.24,73.87 44.415,73.695 44.415,73.231 R2.1
NetR5_1: R5.1 U1.27 | length 3.6
  Top Layer w0.381: R5.1 52.301,98.806 52.301,98.321 52.644,97.978 53.636,97.978 54.121,97.493 54.121,96.934 U1.27
NetR7_1: R7.1 U1.16 | length 7.9
  Top Layer w0.381: U1.16 55.833,82.007 56.673,82.007 56.896,81.783 56.896,76.437 57.41,75.923 R7.1@57.785,75.923
"SCLK ESP32": R8.2 U1.20 | length 2.4
  Top Layer w0.191: U1.20 56.683,87.29 57.15,87.757 R8.2@57.847,87.757
"SCLK SENSOR": R8.1 U4.4 | length 2.4
  Top Layer w0.191: R8.1 61.146,87.891 61.52,87.518 U4.4
VCC: 1.1 C7.1 C8.2 pad.12 U3.3 | length 103.8
  Bottom Layer w0.381: C8.2@38.354,74.089 40.253,75.988 41.179,75.988 C7.1 ; 40.767,76.2 41.11,76.2 C7.1@41.225,76.085 ; pad.12 48.514,101.346 51.339,101.346 51.562,101.123 51.562,81.033 51.912,80.683 54.968,80.683 55.944,81.659 59,81.659 59.442,81.217 59.442,70.999 55.626,67.183 44.46,67.183 44.206,66.929 39.054,66.929 36.621,69.362 36.621,73.084 37.067,73.53 37.97,73.53 C8.2 38.354,73.739 37.383,72.768 37.383,69.678 39.37,67.691 v2(43.307,67.691) 43.847,68.231 43.847,70.751 45.487,72.39 49.013,72.39 49.394,72.771 49.92,72.771 50.301,72.39 U3.3 U3.3@52.324,72.324
pads on no net: J1. J1.S1 J1.S2 J1.S3 J1.S4 U1.4 U1.5 U1.6 U1.8 U1.9 U1.10 U1.11 U1.12 U1.15 U1.17 U1.22 U1.23 U1.24 U1.25 U1.26 U1.28 U1.29 U1.30 U1.31 U1.32 U1.33 U1.34 U1.35 U1.36 U1.37 U1.38 U1.39

## Polygon pours and split planes (outlines as drawn)
GND on Bottom Layer "GND_L04_P001" (solid, remove dead copper, pour order 1): 31.877,105.41 32.131,105.664 70.739,105.664 70.739,60.071 67.564,56.896 66.04,58.42 31.75,58.42 32.004,58.674 31.75,58.674
GND on Top Layer "TOP_GND" (solid, remove dead copper, pour order 0): 33.655,105.156 34.036,104.775 68.453,104.775 68.453,58.166 68.199,57.912 67.691,58.42 33.528,58.42 33.528,58.547 33.655,58.674
GND on GND 2 (split plane): 66.038,63.121 36.578,63.121 36.578,102.106 66.038,102.106
GND on GND 1 (split plane): 66.038,63.121 36.578,63.121 36.578,102.106 66.038,102.106

## Silkscreen, mask and mechanical layers (free items; w line width, h text height)
Top Overlay:
  text "Reset" at 65.786,77.343 h0.5 r90
  text "Power" at 62.484,67.31 h0.5
  text "Over Temp" at 37.275,67.183 h0.51
Bottom Overlay:
  text "5V" at 41.529,100.076 h1

## Text inside footprints (layer, text, board x,y; h text height)
U1: Top 3D Body "ANTENNA" at 33.63,83.425 h1.27 r90